# EAGLE board Final(1) (EAGLE 9.2.2)
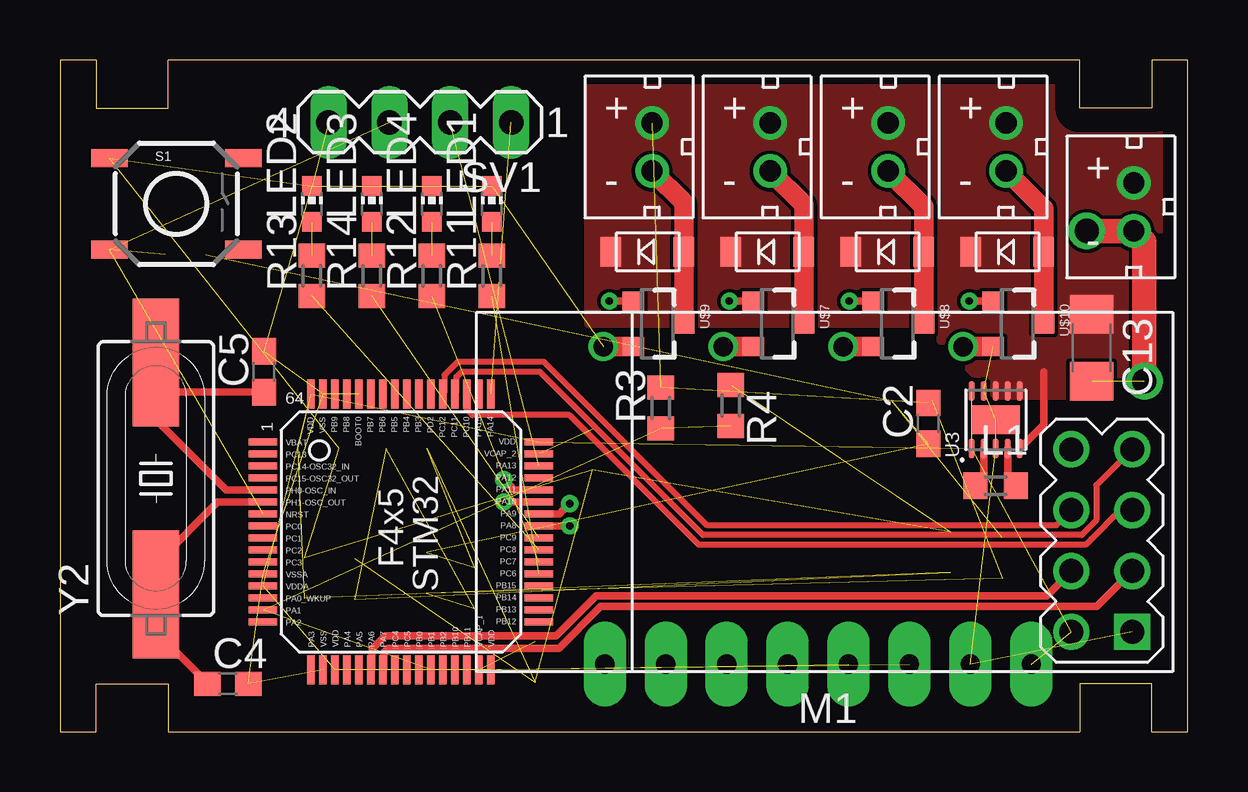
[diagram p0: board, top side]
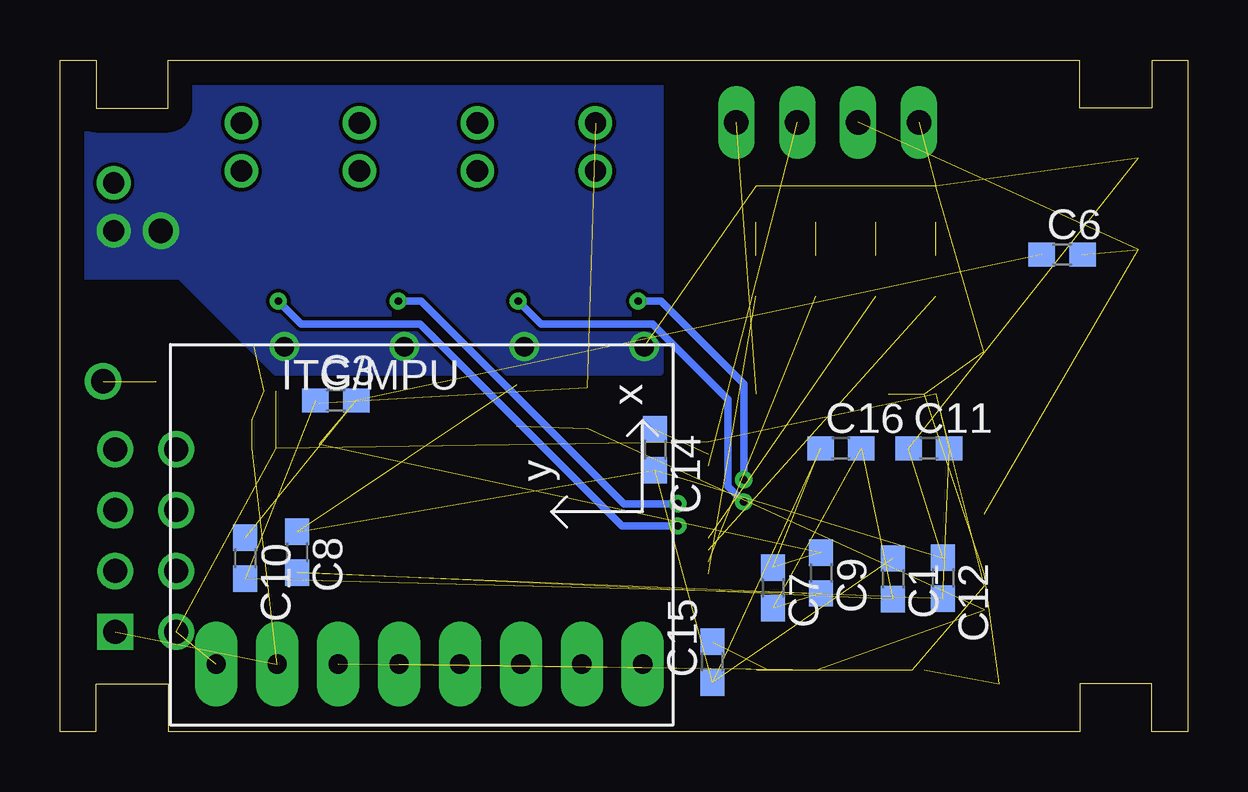
[diagram p1: board, bottom side, seen from below]

Size 47 x 28 mm. Coordinates in mm from the lower left corner, seen from the top.
Outline: 0,0 1.5,0 1.5,2 4.5,2 4.5,0 42.5,0 42.5,2 45.5,2 45.5,0 47,0 47,28 45.5,28 45.5,26 42.5,26 42.5,28 4.5,28 4.5,26 1.5,26 1.5,28 0,28 0,0
Copper layers (1*16): Top 0.035mm / dielectric 1.5mm / Bottom 0.035mm
Design rules "default": minimum track width 6mil, minimum drill 0.35mm, track to track 6mil, track to pad 6mil, pad to pad 6mil, via to via 6mil, smd to smd 6mil, copper to edge 40mil, drill to drill 6mil, minimum pad ring 10mil, minimum via ring 8mil, stop-mask expansion 4mil, vias tented up to drill 0mil, thermal gap 10mil

## Footprints (pad centres in the part's own frame; a part is rotated, then mirrored left to right if it is on the bottom)
C0603 = smd 1.1 x 1: 1 -0.85,0; 2 0.85,0
C1206 = smd 1.6 x 1.8: 1 -1.4,0; 2 1.4,0
L0603 = smd 1 x 1.1: 1 -0.85,0; 2 0.85,0
CHIP-LED0603 = smd 0.8 x 0.8: A 0,-0.75; C 0,0.75
WIRELESS-NRF24L01 = drill 1 square: 1 -12.7,6.35 | drill 1: 2 -10.16,6.35; 3 -12.7,3.81; 4 -10.16,3.81; 5 -12.7,1.27; 6 -10.16,1.27; 7 -12.7,-1.27; 8 -10.16,-1.27
R0603 = smd 1 x 1.1: 1 -0.85,0; 2 0.85,0
TACTILE-SWITCH-SMD = smd 1.524 x 0.762: 1 -2.794,1.905; 2 2.794,1.905; 3 -2.794,-1.905; 4 2.794,-1.905
MA04-1 = drill 1.016 long: 1 -3.81,0; 2 -1.27,0; 3 1.27,0; 4 3.81,0
GY-521 = drill 0.8 pad 1.778 long: ADO -8.89,-6.35; GND -8.89,6.35; INT -8.89,-8.89; SCL -8.89,3.81; SDA -8.89,1.27; VCC -8.89,8.89; XCL -8.89,-3.81; XDA -8.89,-1.27
SON50P250X250X80-11N = smd 0.81 x 0.27: 1 -1.205,1; 2 -1.205,0.5; 3 -1.205,0; 4 -1.205,-0.5; 5 -1.205,-1; 6 1.205,-1; 7 1.205,-0.5; 8 1.205,0; 9 1.205,0.5; 10 1.205,1 | smd 1.2 x 2: 11 0,0
STM32F405/415_LQFP64 = smd 1.2 x 0.3: BOOT0 -5.75,-1.75; PA3 5.75,-3.75; PA4 5.75,-2.25; PA5 5.75,-1.75; PA6 5.75,-1.25; PA7 5.75,-0.75; PA14 -5.75,3.75; PA15 -5.75,3.25; PB0 5.75,0.75; PB1 5.75,1.25; PB2 5.75,1.75; PB3 -5.75,0.75; PB4 -5.75,0.25; PB5 -5.75,-0.25; PB6 -5.75,-0.75; PB7 -5.75,-1.25; PB8 -5.75,-2.25; PB9 -5.75,-2.75; PB10 5.75,2.25; PB11 5.75,2.75; PC4 5.75,-0.25; PC5 5.75,0.25; PC10 -5.75,2.75; PC11 -5.75,2.25; PC12 -5.75,1.75; PD2 -5.75,1.25; VCAP_1 5.75,3.25; VDD_0 5.75,-2.75; VDD_1 5.75,3.75; VDD_3 -5.75,-3.75; VSS_0 5.75,-3.25; VSS_1 -5.75,-3.25 | smd 0.3 x 1.2: NRST -0.75,-5.75; PA0_WKUP 2.75,-5.75; PA1 3.25,-5.75; PA2 3.75,-5.75; PA8 -0.25,5.75; PA9 -0.75,5.75; PA10 -1.25,5.75; PA11 -1.75,5.75; PA12 -2.25,5.75; PA13 -2.75,5.75; PB12 3.75,5.75; PB13 3.25,5.75; PB14 2.75,5.75; PB15 2.25,5.75; PC0 -0.25,-5.75; PC1 0.25,-5.75; PC2 0.75,-5.75; PC3 1.25,-5.75; PC6 1.75,5.75; PC7 1.25,5.75; PC8 0.75,5.75; PC9 0.25,5.75; PC13 -3.25,-5.75; PC14 -2.75,-5.75; PC15 -2.25,-5.75; PH0 -1.75,-5.75; PH1 -1.25,-5.75; VBAT -3.75,-5.75; VCAP_2 -3.25,5.75; VDD_2 -3.75,5.75; VDDA 2.25,-5.75; VSSA 1.75,-5.75
JST_CONNECTOR_FEMALE = drill 0.889: + 0,1; - 0,-1
SOT23-3 = smd 0.8 x 0.9: 1 -0.95,-1; 2 0.95,-1; 3 0,1.1
MINI2-F3-B = smd 1.22 x 0.85: NEG 0,1.55; POS 0,-1.5
HC49UP = smd 5.334 x 1.93: 1 -4.826,0; 2 4.826,0

## Placement (x,y rotation side)
C1  100nF  [C0603]  12.28,6.37 270 bottom
C2  10uF  [C0603]  36.2,12.85 90 top
C3  22uF  [C0603]  35.5,13.8 0 bottom
C4  16pF  [C0603]  7,2 0 top
C5  16pF  [C0603]  8.5,15 90 top
C6  1uF  [C0603]  5.23,19.88 0 bottom
C7  100nF  [C0603]  17.28,5.99 270 bottom
C8  10uF  [C0603]  37.12,7.48 270 bottom
C9  100nF  [C0603]  15.28,6.61 270 bottom
C10  100nF  [C0603]  39.28,7.23 270 bottom
C11  100nF  [C0603]  10.78,11.8 0 bottom
C12  100nF  [C0603]  10.2,6.4 270 bottom
C13  100uF  [C1206]  43,16 270 top
C14  2.2uF  [C0603]  22.2,11.75 270 bottom
C15  2.2uF  [C0603]  19.8,2.9 90 bottom
C16  4.7uF  [C0603]  14.45,11.8 0 bottom
L1  2.2uH  [L0603]  39,10.25 0 top
LED1  Blue  [CHIP-LED0603]  18,22 0 top
LED2  Green  [CHIP-LED0603]  10.5,22 0 top
LED3  Green  [CHIP-LED0603]  13,22 0 top
LED4  Blue  [CHIP-LED0603]  15.5,22 0 top
M1  WIRELESS-NRF24L01  [WIRELESS-NRF24L01]  32,10.5 180 top
R3  10k  [R0603]  25.04,13.49 90 top
R4  10k  [R0603]  27.96,13.59 270 top
R11  1k  [R0603]  18,19 90 top
R12  1k  [R0603]  15.5,19 90 top
R13  1k  [R0603]  10.5,19 90 top
R14  1k  [R0603]  13,19 90 top
S1  SWITCH-MOMENTARY-2SMD  [TACTILE-SWITCH-SMD]  4.85,22 0 top
SV1  [MA04-1]  15,25.4 180 top
U2  GY-521MPU6050  [GY-521]  31.6,11.7 90 bottom
U3  RT6150B-33GQW  [SON50P250X250X80-11N]  39,13 90 top
U$1  STM32F405/415_LQFP64  [STM32F405/415_LQFP64]  14.21,8.32 270 top
U$2  JST_CONNECTOR_FEMALE  [JST_CONNECTOR_FEMALE]  44.76,21.87 0 top
U$3  JST_CONNECTOR_FEMALE  [JST_CONNECTOR_FEMALE]  24.68,24.37 0 top
U$4  JST_CONNECTOR_FEMALE  [JST_CONNECTOR_FEMALE]  29.6,24.37 0 top
U$5  JST_CONNECTOR_FEMALE  [JST_CONNECTOR_FEMALE]  34.52,24.37 0 top
U$6  JST_CONNECTOR_FEMALE  [JST_CONNECTOR_FEMALE]  39.44,24.37 0 top
U$7  N-CHANNEL-MOSFET-IRLML6244TRPBF  [SOT23-3]  29.9,17 270 top
U$8  N-CHANNEL-MOSFET-IRLML6244TRPBF  [SOT23-3]  34.9,17 270 top
U$9  N-CHANNEL-MOSFET-IRLML6244TRPBF  [SOT23-3]  24.9,17 270 top
U$10  N-CHANNEL-MOSFET-IRLML6244TRPBF  [SOT23-3]  39.9,17 270 top
U$11  DB2W40300L  [MINI2-F3-B]  24.5,20 90 top
U$12  DB2W40300L  [MINI2-F3-B]  34.5,20 90 top
U$13  DB2W40300L  [MINI2-F3-B]  29.5,20 90 top
U$14  DB2W40300L  [MINI2-F3-B]  39.5,20 90 top
Y2  12MHz  [HC49UP]  4,10.55 90 top

## Library data of the parts
C1-C13 C16 = rcl; SPICEPREFIX: C
C14 C15 = rcl
L1 = rcl-2
LED1-LED4 = led
M1 U2 U$1-U$6 U$11-U$14 Y2 = AP_quad
R3 R4 R11-R14 = rcl; SPICEPREFIX: R
S1 = AP_quad; PROD_ID: SWCH-08247
SV1 = con-lstb; OC_FARNELL: unknown; OC_NEWARK: unknown
U3 = RT6150B-33GQW; DESCRIPTION: Dc/Dc Conv, Buck-Boost, 1mhz, Wdfn-10; DIGI-KEY_PART_NUMBER: RT6150B-33GQWCT-ND; DIGI-KEY_PURCHASE_URL: https://www.digikey.com/product-detail/en/richtek-usa-inc/RT6150B-33GQW/RT6150B-33GQWCT-ND/6676777?utm_source=snapeda&utm_medium=aggregator&utm_campaign=symbol; MF: Richtek USA; MP: RT6150B-33GQW; PACKAGE: WFDFN-10 Richtek
U$7-U$10 = AP_quad; DATASHEET: http://www.mouser.com/ds/2/196/irlml6244pbf-936666.pdf; MOUSER: 942-IRLML6244TRPBF; URL: http://www.mouser.com/Search/ProductDetail.aspx?R=IRLML6244TRPBFvirtualkey57370000virtualkey942-IRLML6244TRPBF

## Nets
3.7V: C2.2 C13.1 R3.2 U3.5 U3.6 U3.7 U3.8 U$2.+ U$3.+ U$4.+ U$5.+ U$6.+ U$11.NEG U$12.NEG U$13.NEG U$14.NEG
ANALOG: R3.1 R4.2 U$1.PA1 U$1.PB1
CE: M1.3 U$1.PA7
CSN: M1.4 U$1.PA6
GND: C1.1 C2.1 C3.2 C4.2 C5.2 C6.1 C7.1 C8.1 C9.1 C10.1 C11.1 C12.1 C13.2 C14.2 C15.1 C16.1 LED1.C LED2.C LED3.C LED4.C M1.1 R4.1 S1.1 SV1.4 U2.GND U3.3 U3.9 U3.11 U$1.BOOT0 U$1.VSS_0 U$1.VSS_1 U$1.VSSA U$2.- U$7.2 U$8.2 U$9.2 U$10.2
LED_MISO: R14.1 U$1.PC9
LED_PWR: R11.1 U$1.PC6
LED_RST: R12.1 U$1.PC7
LED_SWDIO: R13.1 U$1.PC8
MISO: M1.7 U$1.PC11
MOSI: M1.6 U$1.PC12
N$1: L1.2 U3.4
N$2: L1.1 U3.2
N$4: U$3.- U$9.3 U$11.POS
N$5: U$5.- U$8.3 U$12.POS
N$6: U$4.- U$7.3 U$13.POS
N$7: U$6.- U$10.3 U$14.POS
N$8: LED1.A R11.2
N$9: LED4.A R12.2
N$10: LED2.A R13.2
N$11: LED3.A R14.2
N$12: C15.2 U$1.VCAP_1
N$13: C14.1 U$1.VCAP_2
OSC_IN: C5.1 U$1.PH0 Y2.2
OSC_OUT: C4.1 U$1.PH1 Y2.1
RESET: C6.2 S1.3 SV1.3 U$1.NRST
SCK: M1.5 U$1.PC10
SCL: U2.SCL U$1.PB10
SDA: U2.SDA U$1.PB11
SWCLK: SV1.1 U$1.PA14
SWDIO: SV1.2 U$1.PA13
TIM1: U$1.PA8 U$10.1
TIM2: U$1.PA9 U$8.1
TIM3: U$1.PA10 U$7.1
TIM4: U$1.PA11 U$9.1
VOUT: C1.2 C3.1 C7.2 C8.2 C9.2 C10.2 C11.2 C12.2 C16.2 M1.2 U2.VCC U3.1 U3.10 U$1.VDD_0 U$1.VDD_1 U$1.VDD_2 U$1.VDD_3 U$1.VDDA

## Tracks (layer width: path | path; a pad name or v marks a point on that pad's centre or on a via)
3.7V  (2 unrouted)
  Top 0.305: U3.5 41,12.79 41,15
  pour Top (no thermals): 47,28 22,28 22,17 35,17 36,17 39,14 47,14
ANALOG  (3 unrouted)
CE
  Top 0.305: M1.3 43.22,5.21 22.53,5.21 20.8,3.48 13.68,3.48 13.51,3.3 13.51,2.62 U$1.PA7
CSN
  Top 0.305: M1.4 41.14,5.67 22.34,5.67 20.68,4 13.56,4 13,3.44 13,2.61 U$1.PA6
GND  (via drill 0.81, 1.02)  (32 unrouted)
  Top 0.813: U$9.2 v22.65,16.05 | v27.65,16.05 U$7.2 | v32.65,16.05 U$8.2 | v37.65,16.05 U$10.2
  Top 1.016: v42.8,20.87 U$2.- 45.2,20.43 v45.2,14.6
  pour Bottom (no thermals): 47,28 22,28 22,15 38,15 42,19 47,19
LED_MISO  (1 unrouted)
LED_PWR  (1 unrouted)
LED_RST  (1 unrouted)
LED_SWDIO  (1 unrouted)
MISO
  Top 0.254: M1.7 43.19,10.26 43.19,8.8 42.59,8.2 26.8,8.2 20,15 16.75,15 16.53,14.79 16.53,14.14 U$1.PC11
MOSI
  Top 0.254: M1.6 41.53,8.6 26.97,8.6 20.17,15.41 16.58,15.41 16.03,14.86 16.03,14.14 U$1.PC12
N$1
  Top 0.305: U3.4 39.5,10.6 L1.2
N$2
  Top 0.305: U3.2 38.5,10.6 L1.1
N$4
  Top 0.813: U$3.- 26,22.05 U$11.POS U$9.3
N$5
  Top 0.813: U$5.- 36,21.89 U$12.POS U$8.3
N$6
  Top 0.813: U$4.- 31,21.97 U$13.POS U$7.3
N$7
  Top 0.813: U$6.- 41,21.81 U$14.POS U$10.3
N$8  (1 unrouted)
N$9  (1 unrouted)
N$10  (1 unrouted)
N$11  (1 unrouted)
N$12  (1 unrouted)
N$13  (1 unrouted)
OSC_IN
  Top 0.305: U$1.PH0 6.93,10.07 4,13 4,15 | 4,15 Y2.2 | C5.1 4.85,14.15 4,15
OSC_OUT
  Top 0.305: U$1.PH1 6.57,9.57 4,7 Y2.1 4,4.15 4.98,3.17 5.67,2.48 C4.1
RESET  (3 unrouted)
SCK
  Top 0.254: U$1.PC10 16.96,13.43 17.19,13.19 21.23,13.19 26.64,7.79 42.76,7.79 42.98,8.02 44.2,9.23 M1.5
SCL  (1 unrouted)
SDA  (1 unrouted)
SWCLK  (1 unrouted)
SWDIO  (1 unrouted)
TIM1  (via drill 0.3)
  Top 0.305: v37.9,17.95 U$10.1 | U$1.PA8 v21.25,8.57
  Bottom 0.305: v21.25,8.57 23.57,8.57 32,17 36.95,17 v37.9,17.95
TIM2  (via drill 0.3)
  Top 0.305: v32.9,17.95 U$8.1 | U$1.PA9 20.82,9.07 20.98,9.23 v21.25,9.5
  Bottom 0.305: v21.25,9.5 23.5,9.5 31.95,17.95 v32.9,17.95
TIM3  (via drill 0.3)
  Top 0.305: v27.9,17.95 U$7.1 | U$1.PA10 v18.5,9.57
  Bottom 0.305: v27.9,17.95 26.95,17 22.31,17 19.16,13.85 19.16,10.23 18.77,9.84 v18.5,9.57
TIM4  (via drill 0.3)
  Top 0.305: v22.9,17.95 U$9.1 | U$1.PA11 18.93,10.07 18.77,10.23 v18.5,10.5
  Bottom 0.305: v18.5,10.5 18.5,14.5 21.95,17.95 v22.9,17.95
VOUT  (17 unrouted)